# Altium PCB PCB.PcbDoc
Units mil, origin at the board's own origin, x right, y up, seen from the top; angles counter-clockwise.
Board outline 3910.03 x 3910.03 mil, 2 copper layers (Top Layer, Bottom Layer); 122 components, 81 nets, 452 pads, 78 vias.
Unrouted connection lines stored in the file: 29.
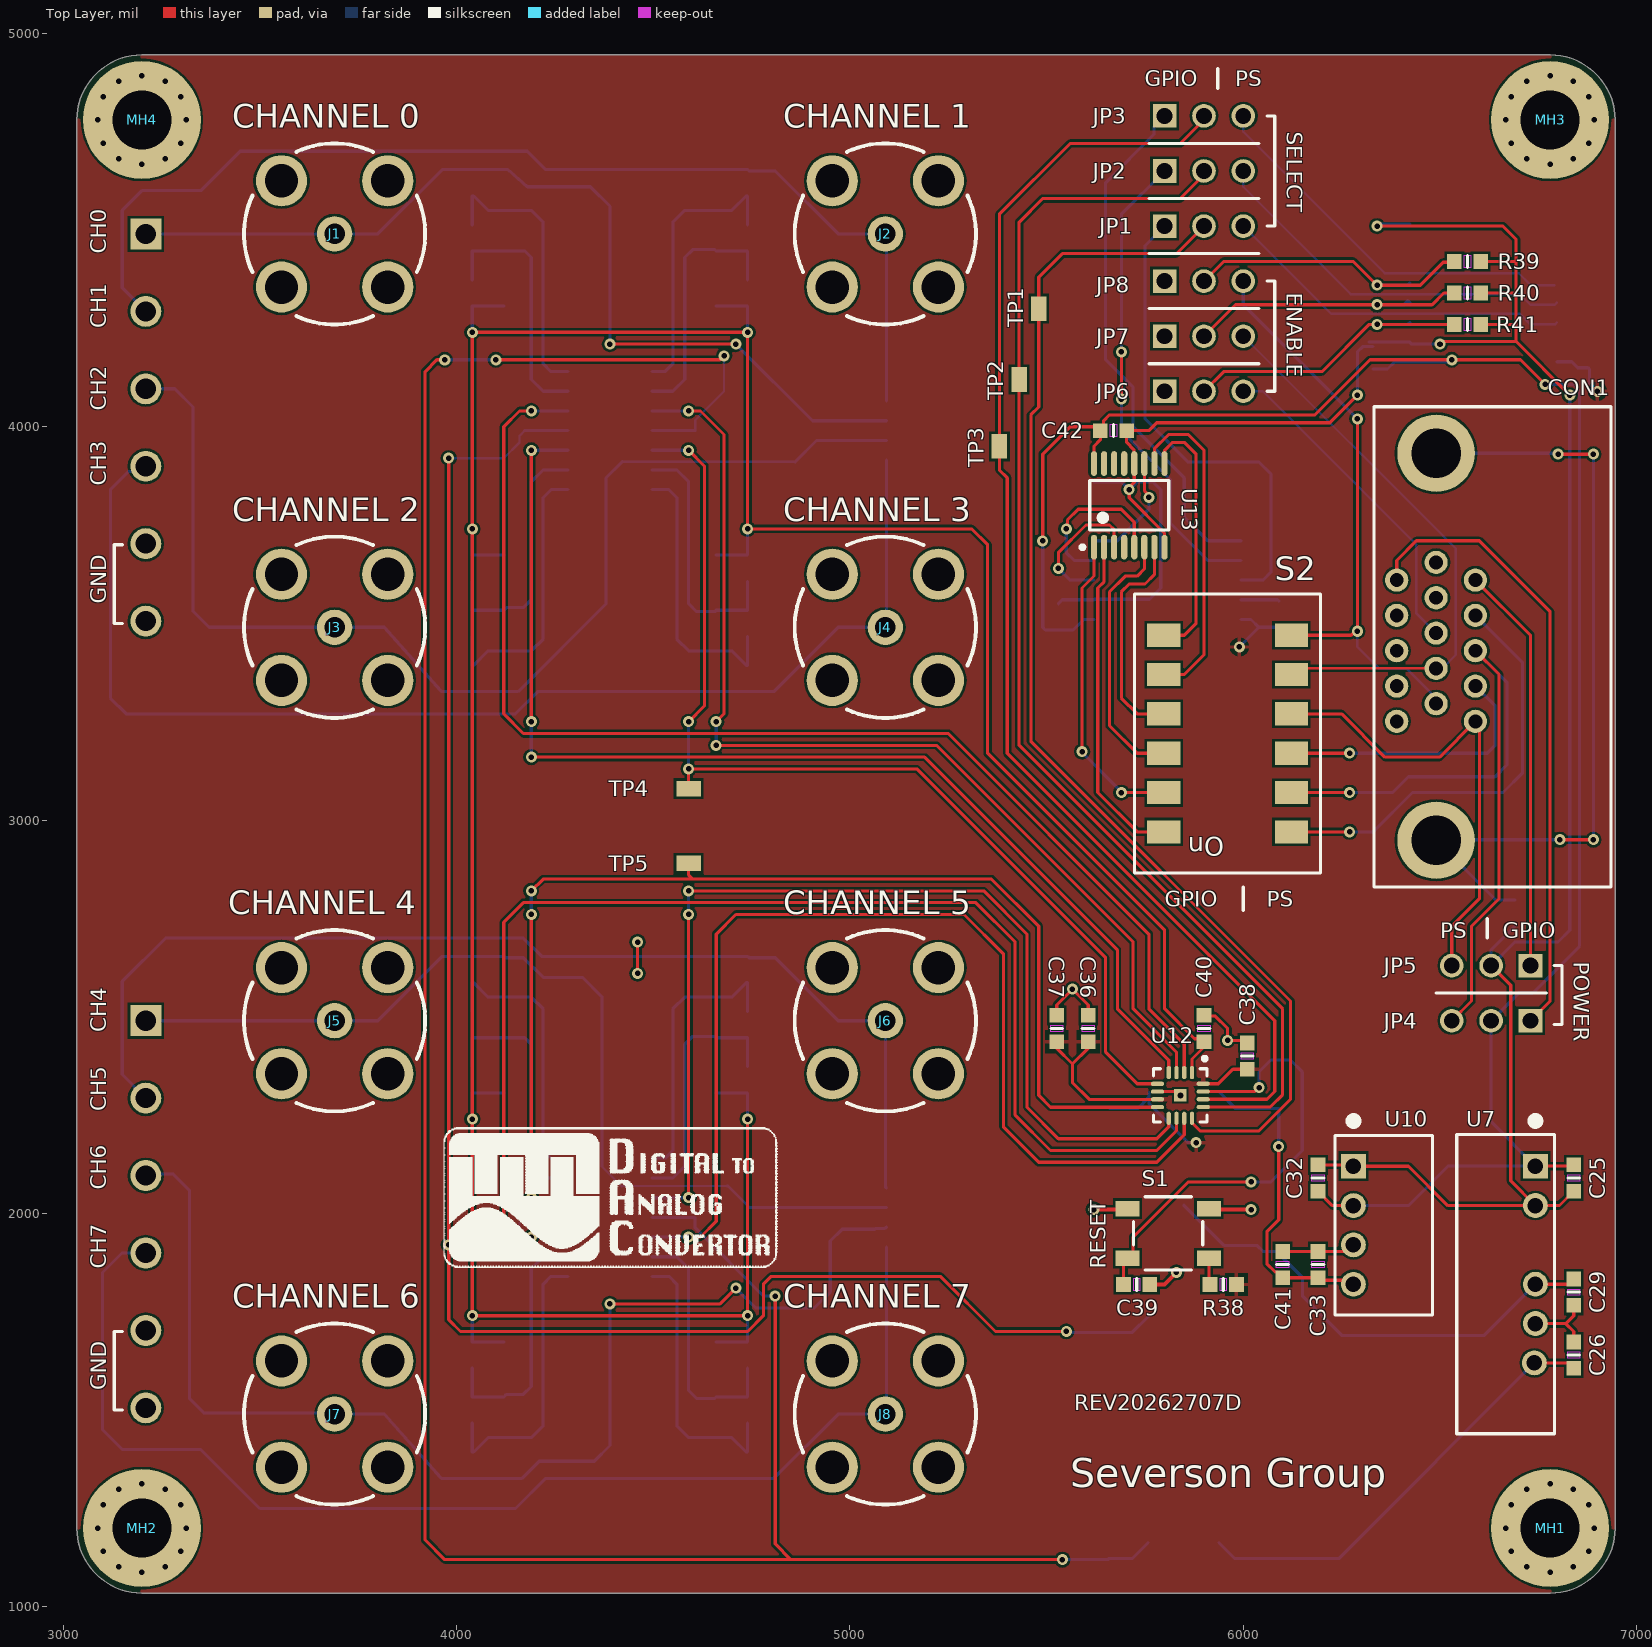
[diagram p0: Top Layer view]
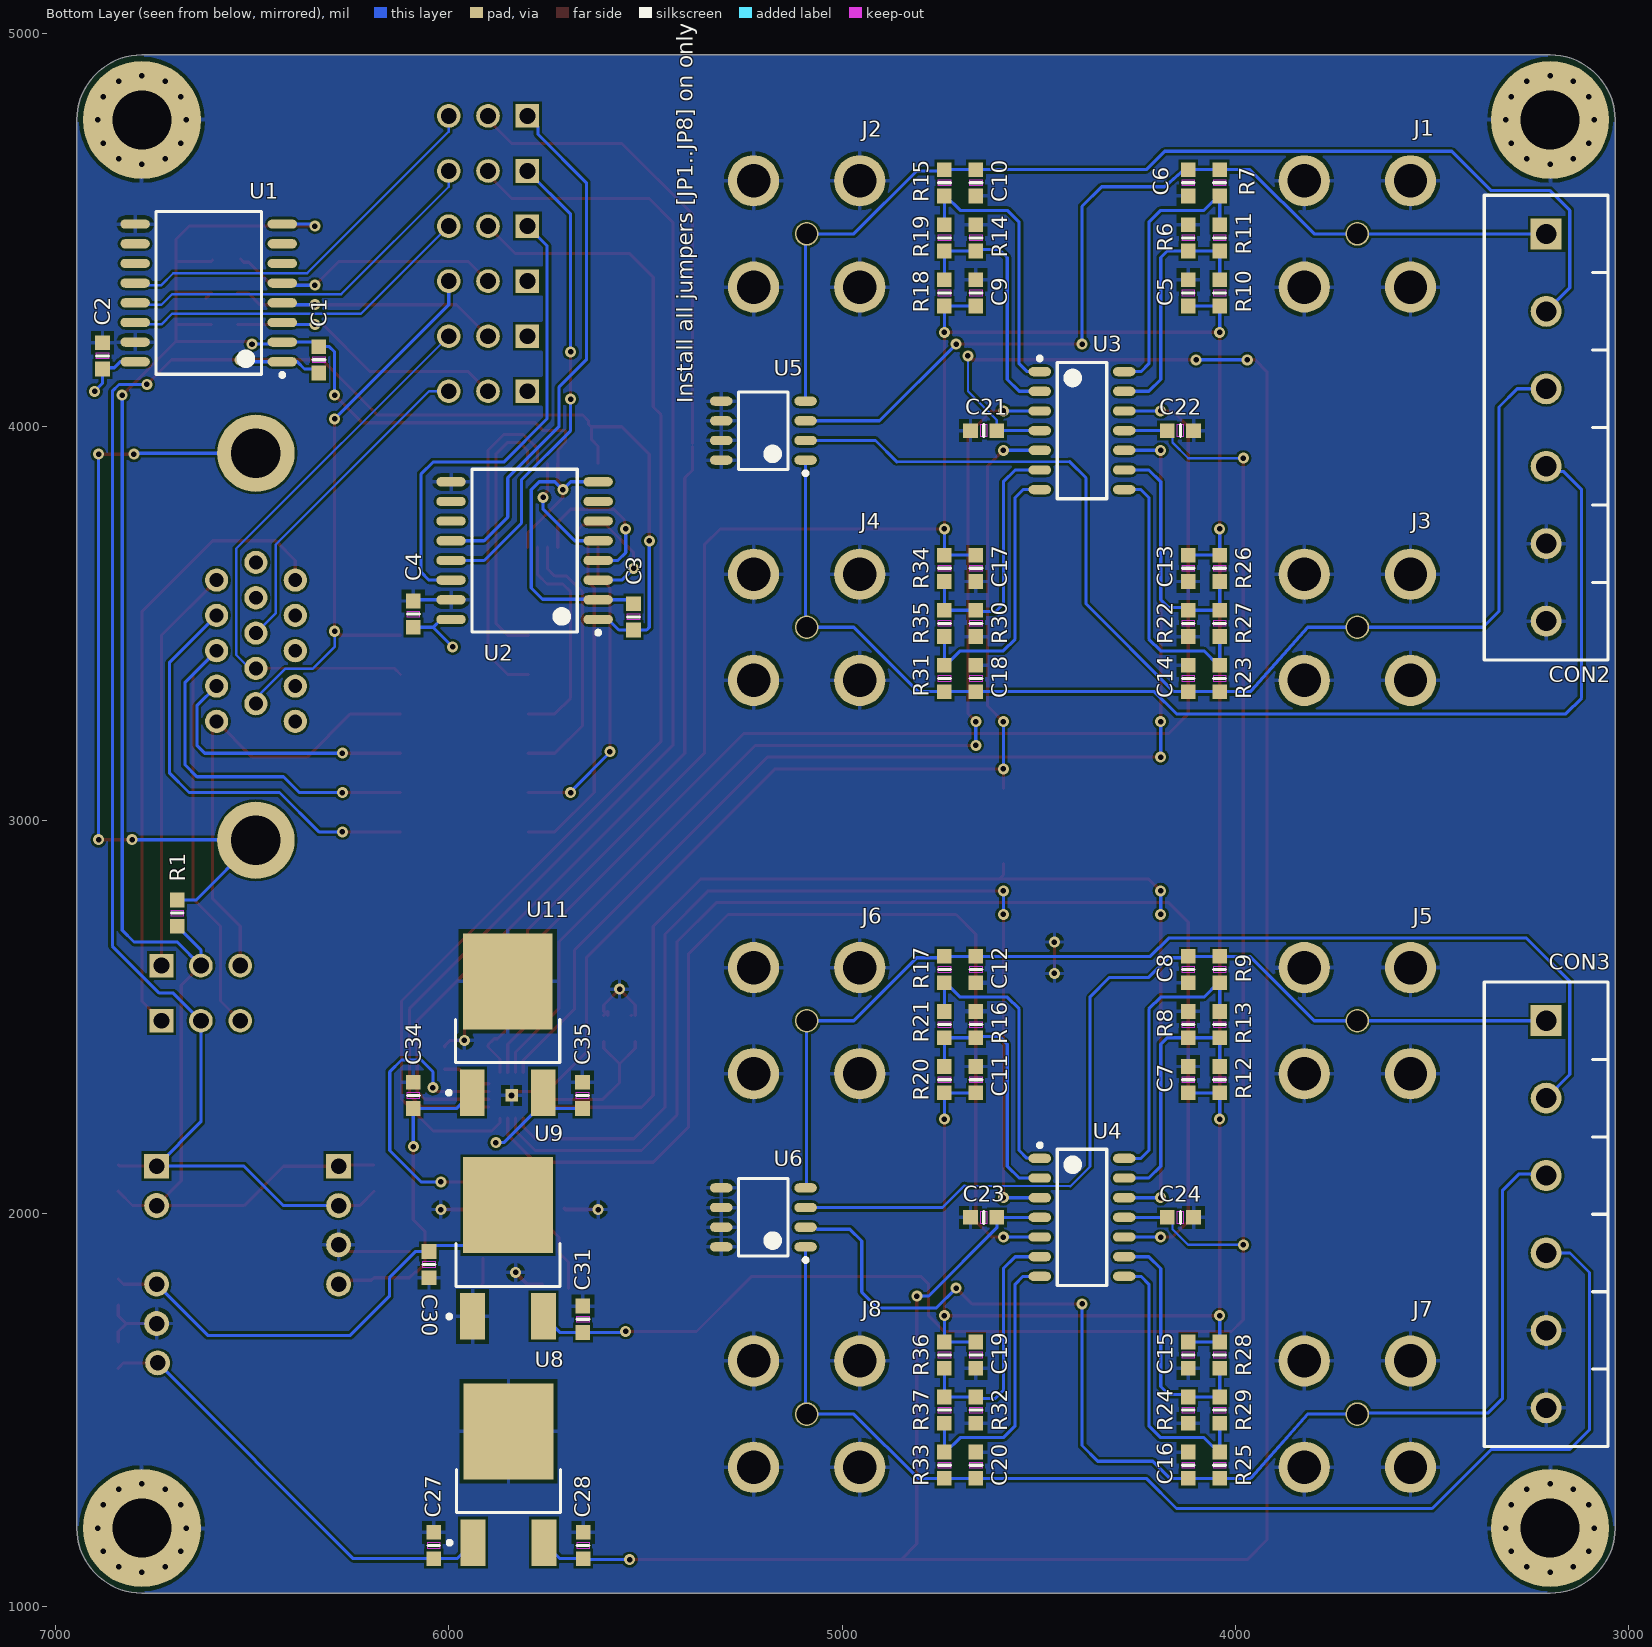
[diagram p1: Bottom Layer view, seen from below]

## Layer stack, top to bottom
Top Solder: solder mask 0.4, Solder Resist, Dk 3.5
Top Layer: signal copper 1.4
Dielectric 1: dielectric 12.6, FR-4, Dk 4.8
Bottom Layer: signal copper 1.4
Bottom Solder: solder mask 0.4, Solder Resist, Dk 3.5

## Board outline
6945.02,4780 ccw(c6780,4780) 6780,4945.02 3200,4945.02 ccw(c3200,4780) 3034.99,4780 3034.99,1200 ccw(c3200,1200) 3200,1034.98 6780,1034.98 ccw(c6780,1200) 6945.02,1200

## Design rules (kind name [scope] priority, off if disabled: settings)
Clearance [All] p1: gap=6 ignorepadtopadclearanceinfootprint=FALSE except(0: Arc-Hole Track-Hole SMDPad-Hole THPad-Hole Via-Hole Fill-Hole Poly-Hole Region-Hole Text-Hole)
DiffPairsRouting [All] p1: maxlimit=10 minlimit=10 mostfreqgap=10 substack1={6DC5AF7B-AFB7-40CB-90A0-DD7BBE91D74D} toplayer_{6dc5af7b-afb7-40cb-90a0-dd7bbe91d74d}_minwidth=15 toplayer_{6dc5af7b-afb7-40cb-90a0-dd7bbe91d74d}_maxwidth=15 toplayer_{6dc5af7b-afb7-40cb-90a0-dd7bbe91d74d}_prefwidth=15 bottomlayer_{6dc5af7b-afb7-40cb-90a0-dd7bbe91d74d}_minwidth=15 bottomlayer_{6dc5af7b-afb7-40cb-90a0-dd7bbe91d74d}_maxwidth=15 bottomlayer_{6dc5af7b-afb7-40cb-90a0-dd7bbe91d74d}_prefwidth=15 substack2={B2F53289-923C-4D80-BDE0-C70317A132FC} toplayer_{b2f53289-923c-4d80-bde0-c70317a132fc}_minwidth=15 toplayer_{b2f53289-923c-4d80-bde0-c70317a132fc}_maxwidth=15 toplayer_{b2f53289-923c-4d80-bde0-c70317a132fc}_prefwidth=15 bottomlayer_{b2f53289-923c-4d80-bde0-c70317a132fc}_minwidth=15 bottomlayer_{b2f53289-923c-4d80-bde0-c70317a132fc}_maxwidth=15 bottomlayer_{b2f53289-923c-4d80-bde0-c70317a132fc}_prefwidth=15 substack3={6217F55B-C9BC-4BE3-A519-856FA9E1F721} toplayer_{6217f55b-c9bc-4be3-a519-856fa9e1f721}_minwidth=15 toplayer_{6217f55b-c9bc-4be3-a519-856fa9e1f721}_maxwidth=15 toplayer_{6217f55b-c9bc-4be3-a519-856fa9e1f721}_prefwidth=15 bottomlayer_{6217f55b-c9bc-4be3-a519-856fa9e1f721}_minwidth=15 bottomlayer_{6217f55b-c9bc-4be3-a519-856fa9e1f721}_maxwidth=15 bottomlayer_{6217f55b-c9bc-4be3-a519-856fa9e1f721}_prefwidth=15 toplayer_minwidth=15 toplayer_maxwidth=15 toplayer_prefwidth=15 bottomlayer_minwidth=15 bottomlayer_maxwidth=15 bottomlayer_prefwidth=15 substack4={D87052B6-A27C-401B-AC05-89099C7DFB8A} toplayer_{d87052b6-a27c-401b-ac05-89099c7dfb8a}_minwidth=15 toplayer_{d87052b6-a27c-401b-ac05-89099c7dfb8a}_maxwidth=15 toplayer_{d87052b6-a27c-401b-ac05-89099c7dfb8a}_prefwidth=15 bottomlayer_{d87052b6-a27c-401b-ac05-89099c7dfb8a}_minwidth=15 bottomlayer_{d87052b6-a27c-401b-ac05-89099c7dfb8a}_maxwidth=15 bottomlayer_{d87052b6-a27c-401b-ac05-89099c7dfb8a}_prefwidth=15 substack5={7E4C404F-C848-4BC7-B60F-ECC0B7D8BEE9} toplayer_{7e4c404f-c848-4bc7-b60f-ecc0b7d8bee9}_minwidth=15 toplayer_{7e4c404f-c848-4bc7-b60f-ecc0b7d8bee9}_maxwidth=15 toplayer_{7e4c404f-c848-4bc7-b60f-ecc0b7d8bee9}_prefwidth=15 bottomlayer_{7e4c404f-c848-4bc7-b60f-ecc0b7d8bee9}_minwidth=15 bottomlayer_{7e4c404f-c848-4bc7-b60f-ecc0b7d8bee9}_maxwidth=15 bottomlayer_{7e4c404f-c848-4bc7-b60f-ecc0b7d8bee9}_prefwidth=15 substack6={9BDC3B81-D62A-426B-8E99-F9247763E9F1} toplayer_{9bdc3b81-d62a-426b-8e99-f9247763e9f1}_minwidth=15 toplayer_{9bdc3b81-d62a-426b-8e99-f9247763e9f1}_maxwidth=15 toplayer_{9bdc3b81-d62a-426b-8e99-f9247763e9f1}_prefwidth=15 bottomlayer_{9bdc3b81-d62a-426b-8e99-f9247763e9f1}_minwidth=15 bottomlayer_{9bdc3b81-d62a-426b-8e99-f9247763e9f1}_maxwidth=15 bottomlayer_{9bdc3b81-d62a-426b-8e99-f9247763e9f1}_prefwidth=15 maxuncoupledlength=500
HoleSize [All] p1: absolutevalues=TRUE maxlimit=250 minlimit=14 maxpercent=80.000 minpercent=20.000
MinimumSolderMaskSliver MinimumSolderMaskSliverException [HasFootprint('QFN50P300X300X80_HS-17N') vs HasFootprint('QFN50P300X300X80_HS-17N')] p1: minsoldermaskwidth=5.5
MinimumSolderMaskSliver [All] p2: minsoldermaskwidth=6
PolygonConnect [All] p1: connectstyle=Relief reliefconductorwidth=10 reliefentries=4 polygonreliefangle="90 Angle" airgapwidth=10
RoutingVias [All] p1: holewidth=14 width=28 viastyle="Through Hole" minholewidth=14 minwidth=28 maxholewidth=28 maxwidth=50
SilkToSilkClearance [All] p1: silktosilkclearance=6
SilkToSolderMaskClearance [IsPad] p1: minsilkscreentomaskgap=6 clearancetoexposedcopper=TRUE
SolderMaskExpansion [All] p1: expansion=4 istentingtop=FALSE
Width [All] p1: maxlimit=20 minlimit=6 preferedwidth=6 substack1={6DC5AF7B-AFB7-40CB-90A0-DD7BBE91D74D} substack2={B2F53289-923C-4D80-BDE0-C70317A132FC} substack3={6217F55B-C9BC-4BE3-A519-856FA9E1F721} substack4={D87052B6-A27C-401B-AC05-89099C7DFB8A} substack5={7E4C404F-C848-4BC7-B60F-ECC0B7D8BEE9} substack6={9BDC3B81-D62A-426B-8E99-F9247763E9F1} minimp=50.000000 maximp=50.000000 favimp=50.000000
25 further rules are at their usual default settings.

## Components (designator, comment, footprint, x,y, rotation, side; value= is the part's Value field where it differs from the comment)
C1 "CC0603KRX7R8BB104" 0603-CAP 6330,4170 r270 bottom value=0.1uF
C2 "CC0603KRX7R8BB104" 0603-CAP 6880,4180 r270 bottom value=0.1uF
C3 "CC0603KRX7R8BB104" 0603-CAP 5530,3516.54 r270 bottom value=0.1uF
C4 "CC0603KRX7R8BB104" 0603-CAP 6090,3523.46 r270 bottom value=0.1uF
C5 "CC0603KRX7R7BB184" 0603-CAP 4120,4340 r90 bottom value=0.18uF
C6 "CC0603KRX7R9BB103" 0603-CAP 4120,4620 r90 bottom value=10nF
C7 "CC0603KRX7R7BB184" 0603-CAP 4120,2340 r90 bottom value=0.18uF
C8 "CC0603KRX7R9BB103" 0603-CAP 4120,2620 r90 bottom value=10nF
C9 "CC0603KRX7R7BB184" 0603-CAP 4660,4340 r90 bottom value=0.18uF
C10 "CC0603KRX7R9BB103" 0603-CAP 4660,4620 r90 bottom value=10nF
C11 "CC0603KRX7R7BB184" 0603-CAP 4660,2340 r90 bottom value=0.18uF
C12 "CC0603KRX7R9BB103" 0603-CAP 4660,2620 r90 bottom value=10nF
C13 "CC0603KRX7R7BB184" 0603-CAP 4120,3640 r270 bottom value=0.18uF
C14 "CC0603KRX7R9BB103" 0603-CAP 4120,3360 r270 bottom value=10nF
C15 "CC0603KRX7R7BB184" 0603-CAP 4120,1640 r270 bottom value=0.18uF
C16 "CC0603KRX7R9BB103" 0603-CAP 4120,1360 r270 bottom value=10nF
C17 "CC0603KRX7R7BB184" 0603-CAP 4660,3640 r270 bottom value=0.18uF
C18 "CC0603KRX7R9BB103" 0603-CAP 4660,3360 r270 bottom value=10nF
C19 "CC0603KRX7R7BB184" 0603-CAP 4660,1640 r270 bottom value=0.18uF
C20 "CC0603KRX7R9BB103" 0603-CAP 4660,1360 r270 bottom value=10nF
C21 "CC0603KRX7R8BB104" 0603-CAP 4640,3990 r180 bottom value=0.1uF
C22 "CC0603KRX7R8BB104" 0603-CAP 4140,3990 r0 bottom value=0.1uF
C23 "CC0603KRX7R8BB104" 0603-CAP 4640,1990 r180 bottom value=0.1uF
C24 "CC0603KRX7R8BB104" 0603-CAP 4140,1990 r0 bottom value=0.1uF
C25 "CL10A475KA8NQNC" 0603-CAP 6840,2090 r90 top value=4.7uF
C26 "CL10B474KO8NNNC" 0603-CAP 6840,1640 r270 top value=0.47uF
C27 "CL10A105KP8NNNC" 0603-CAP 6038,1156 r270 bottom value=1uF
C28 "CL10A105KP8NNNC" 0603-CAP 5658,1156 r270 bottom value=1uF
C29 "CL10B474KO8NNNC" 0603-CAP 6840,1800 r270 top value=0.47uF
C30 "CL10A105KP8NNNC" 0603-CAP 6050,1870 r270 bottom value=1uF
C31 "CL10A105KP8NNNC" 0603-CAP 5659,1731 r90 bottom value=1uF
C32 "CL10A475KA8NQNC" 0603-CAP 6190,2090 r270 top value=4.7uF
C33 "CL10A105KP8NNNC" 0603-CAP 6190,1870 r270 top value=1uF
C34 "CL10A105KP8NNNC" 0603-CAP 6090,2300 r270 bottom value=1uF
C35 "CL10A105KP8NNNC" 0603-CAP 5660,2300 r270 bottom value=1uF
C36 "CL10A475KA8NQNC" 0603-CAP 5605.75,2470 r270 top value=4.7uF
C37 "CC0603KRX7R7BB184" 0603-CAP 5525.75,2470 r270 top value=0.18uF
C38 "CC0603KRX7R7BB184" 0603-CAP 6010,2400 r270 top value=0.18uF
C39 "CC0603KRX7R7BB184" 0603-CAP 5729,1819.43 r180 top value=0.18uF
C40 "CC0603KRX7R7BB184" 0603-CAP 5900,2470 r270 top value=0.18uF
C41 "CL10A105KP8NNNC" 0603-CAP 6100,1870 r270 top value=1uF
C42 "CC0603KRX7R8BB104" 0603-CAP 5670,3990 r180 top value=0.1uF
CON1 "ICD15S13E6GX00LF" ICD15S13E6GX00LF 6490,3440.51 r90 top
CON2 "1935200" 1935200 3210,4490 r270 bottom locked
CON3 "1935200" 1935200 3210,2490 r270 bottom locked
J1 "0731711900" 0731711900 3690,4490 r0 top
J2 "0731711900" 0731711900 5090,4490 r180 top
J3 "0731711900" 0731711900 3690,3490 r0 top
J4 "0731711900" 0731711900 5090,3490 r180 top
J5 "0731711900" 0731711900 3690,2490 r0 top
J6 "0731711900" 0731711900 5090,2490 r180 top
J7 "0731711900" 0731711900 3690,1490 r0 top
J8 "0731711900" 0731711900 5090,1490 r180 top
JP1 "TSW-103-07-F-S" PIN_HEADER_1X3 5900,4510 r0 top
JP2 "TSW-103-07-F-S" PIN_HEADER_1X3 5900,4650 r0 top
JP3 "TSW-103-07-F-S" PIN_HEADER_1X3 5900,4790 r0 top
JP4 "TSW-103-07-F-S" PIN_HEADER_1X3 6630,2490 r180 top
JP5 "TSW-103-07-F-S" PIN_HEADER_1X3 6630,2630 r180 top
JP6 "TSW-103-07-F-S" PIN_HEADER_1X3 5900,4090 r0 top
JP7 "TSW-103-07-F-S" PIN_HEADER_1X3 5900,4230 r0 top
JP8 "TSW-103-07-F-S" PIN_HEADER_1X3 5900,4370 r0 top
MH1 "MOUNT_HOLE" MOUNTING_HOLE 6780,1200 r180 top
MH2 "MOUNT_HOLE" MOUNTING_HOLE 3200,1200 r180 top
MH3 "MOUNT_HOLE" MOUNTING_HOLE 6780,4780 r180 top
MH4 "MOUNT_HOLE" MOUNTING_HOLE 3200,4780 r180 top
R1 "Resistor" 0603-RES 6690,2763.46 r270 bottom value=DNP
R6 "ERJ-PB3B1002V" 0603-RES 4120,4480 r270 bottom value=10K
R7 "RC0603FR-07120RL" 0603-RES 4040,4620 r90 bottom value=120
R8 "ERJ-PB3B1002V" 0603-RES 4120,2480 r270 bottom value=10K
R9 "RC0603FR-07120RL" 0603-RES 4040,2620 r90 bottom value=120
R10 "ERJ-PB3B7501V" 0603-RES 4040,4340 r90 bottom value=7.5K
R11 "ERJ-PB3B3002V" 0603-RES 4040,4480 r90 bottom value=30K
R12 "ERJ-PB3B7501V" 0603-RES 4040,2340 r90 bottom value=7.5K
R13 "ERJ-PB3B3002V" 0603-RES 4040,2480 r90 bottom value=30K
R14 "ERJ-PB3B1002V" 0603-RES 4660,4480 r270 bottom value=10K
R15 "RC0603FR-07120RL" 0603-RES 4740,4620 r90 bottom value=120
R16 "ERJ-PB3B1002V" 0603-RES 4660,2480 r270 bottom value=10K
R17 "RC0603FR-07120RL" 0603-RES 4740,2620 r90 bottom value=120
R18 "ERJ-PB3B7501V" 0603-RES 4740,4340 r90 bottom value=7.5K
R19 "ERJ-PB3B3002V" 0603-RES 4740,4480 r90 bottom value=30K
R20 "ERJ-PB3B7501V" 0603-RES 4740,2340 r90 bottom value=7.5K
R21 "ERJ-PB3B3002V" 0603-RES 4740,2480 r90 bottom value=30K
R22 "ERJ-PB3B1002V" 0603-RES 4120,3500 r90 bottom value=10K
R23 "RC0603FR-07120RL" 0603-RES 4040,3360 r270 bottom value=120
R24 "ERJ-PB3B1002V" 0603-RES 4120,1500 r90 bottom value=10K
R25 "RC0603FR-07120RL" 0603-RES 4040,1360 r270 bottom value=120
R26 "ERJ-PB3B7501V" 0603-RES 4040,3640 r270 bottom value=7.5K
R27 "ERJ-PB3B3002V" 0603-RES 4040,3500 r270 bottom value=30K
R28 "ERJ-PB3B7501V" 0603-RES 4040,1640 r270 bottom value=7.5K
R29 "ERJ-PB3B3002V" 0603-RES 4040,1500 r270 bottom value=30K
R30 "ERJ-PB3B1002V" 0603-RES 4660,3500 r90 bottom value=10K
R31 "RC0603FR-07120RL" 0603-RES 4740,3360 r270 bottom value=120
R32 "ERJ-PB3B1002V" 0603-RES 4660,1500 r90 bottom value=10K
R33 "RC0603FR-07120RL" 0603-RES 4740,1360 r270 bottom value=120
R34 "ERJ-PB3B7501V" 0603-RES 4740,3640 r270 bottom value=7.5K
R35 "ERJ-PB3B3002V" 0603-RES 4740,3500 r270 bottom value=30K
R36 "ERJ-PB3B7501V" 0603-RES 4740,1640 r270 bottom value=7.5K
R37 "ERJ-PB3B3002V" 0603-RES 4740,1500 r270 bottom value=30K
R38 "ERJ-PB3B1002V" 0603-RES 5949,1819.43 r0 top value=10K
R39 "ERJ-PB3B1002V" 0603-RES 6570,4420 r180 top value=10K
R40 "ERJ-PB3B1002V" 0603-RES 6570,4340 r180 top value=10K
R41 "ERJ-PB3B1002V" 0603-RES 6570,4260 r180 top value=10K
S1 "PTS 647 SK38 SMTR2 LFS" PTS647SK38SMTR2LFSCT-ND 5809,1949.43 r180 top
S2 "SDA06H0SBR" SDA06H0SBR 5960,3220 r180 top
TP1 "Test Point" RCU-0C 5480,4300 r0 top
TP2 "Test Point" RCU-0C 5430,4120 r180 top
TP3 "Test Point" RCU-0C 5380,3950 r180 top
TP4 "Test Point" RCU-0C 4590,3080 r90 top
TP5 "Test Point" RCU-0C 4590,2890 r90 top
U1 "ADUM130E1BRWZ" SOIC127P1030X265-16N 6610,4340 r0 bottom
U2 "ADUM130E1BRWZ" SOIC127P1030X265-16N 5807.01,3685 r0 bottom
U3 "OPA4192IDR" SOIC127P600X175-14N 4390,3990 r180 bottom
U4 "OPA4192IDR" SOIC127P600X175-14N 4390,1990 r180 bottom
U5 "SMDA12CTR" SOIC127P600X175-8N-B 5200,3990 r0 bottom
U6 "SMDA12CTR" SOIC127P600X175-8N-B 5200,1990 r0 bottom
U7 "PDME1-S5-D15-S" PDME1-S5-D15-S 6742.57,2120.18 r270 top
U8 "MC78M12BDTRKG" DPAK229P991X238-3N 5848,1304.66 r90 bottom
U9 "MC79M12CDTRKG" DPAK229P991X238-3N 5849,1879.66 r90 bottom
U10 "PDSE1-S5-S9-S" PDSE1-S5-S9-S 6280,1970 r270 top
U11 "MC78M05CDTRKG" DPAK229P991X238-3N 5850,2448.66 r90 bottom
U12 "DAC60508MCRTET" QFN50P300X300X80_HS-17N 5840,2300 r270 top
U13 "AM26C32" TSOP65P640X120-16N 5710,3800 r90 top

## Footprints (in the part's own frame and the unit in brackets; to place one, negate y for a bottom-side part, rotate by r counter-clockwise, add the part's x,y. Pads: shape width x height; smd on the part's side, far side on the other; paste and mask are expansions set on the pad)
0603-CAP [mm]
  rect 0.95x0.95 smd: 1(-0.85,0) 2(0.85,0)
  Top Layer keep-out region: -0.2,0.4 0.2,0.4 0.2,-0.4 -0.2,-0.4
  silkscreen extent 0,-0.38 0,0.38, body extent -0.77,-0.45 0.83,0.45, height 0.78
0603-RES [mm]
  rect 0.95x0.95 smd: 1(-0.85,0) 2(0.85,0)
  Top Layer keep-out region: -0.2,0.4 0.2,0.4 0.2,-0.4 -0.2,-0.4
  silkscreen extent 0,-0.38 0,0.38, body extent -0.8,-0.4 0.8,0.4, height 0.44
1935200 [mm]
  rect 2x2 hole 1.3: 1(0,0)
  round 2 hole 1.3: 2(5,0) 3(10,0) 4(15,0) 5(20,0) 6(25,0)
  silkscreen extent -2.5,-4 27.5,4, body extent -2.9,-4 27.5,5, height 11.5
0731711900 [mil] "CONN BNC JACK STR 75 OHM PCB"
  round 90 / inner round 60 / far side round 60 hole 52: 1(0,0)
  round 130 hole 85: 2(-135,-135)
  round 130 hole 85 paste-99999: 2(-135,135) 2(135,-135) 2(135,135)
  silkscreen extent -230,-230 230,230, body extent -217,-217 217,217, height 657
DPAK229P991X238-3N [mm] "D-PAK, 3-Pads, Body 6.21x6.73mm (max), IPC Medium Density"
  rect 3x1.6 smd: 1(-3.59,2.29) 3(-3.59,-2.29)
  rect 6.2x5.8 smd: 4(3.59,0)
  silkscreen extent -3.72,-3.36 1.12,3.93, body extent -4.35,-3.38 5.56,3.37, height 2.38
ICD15S13E6GX00LF [mm] "CONN DSUB HD RCPT 15POS R/A SLDR"
  round 1.5 hole 0.9: 1(4.305,2.54) 2(2.025,2.54) 3(-0.255,2.54) 4(-2.535,2.54) 5(-4.815,2.54) 6(5.445,0) 7(3.165,0) 8(0.885,0) 9(-1.395,0) 10(-3.675,0) 11(4.305,-2.54) 12(2.025,-2.54) 13(-0.255,-2.54) 14(-2.535,-2.54) 15(-4.815,-2.54)
  round 5 hole 3.2: SH1(12.495,0) SH2(-12.495,0)
  silkscreen extent -15.5,-11.3 15.5,4, body extent -15.5,-17.5 15.5,4.08, height 12.65
MOUNTING_HOLE [mil]
  round 30 hole 14: 1(-112.5,0) 1(-98.43,59.06) 1(-98.43,-59.06) 1(-59.06,98.43) 1(-59.06,-98.43) 1(0,112.5) 1(0,-112.5) 1(59.06,98.43) 1(59.06,-98.43) 1(98.43,59.06) 1(98.43,-59.06) 1(112.5,0)
  round 300 hole 150: 1(0,0)
PDME1-S5-D15-S [mm]
  rect 1.6x1.6 hole 1: 1(0,0)
  round 1.6 hole 1: 2(2.54,0) 4(7.62,0) 5(10.16,0) 6(12.704,-0.065)
  silkscreen extent -3.17,-5.08 17.28,1.24, body extent -2.23,-4.92 17.42,1.08, height 10.16
PDSE1-S5-S9-S [mm]
  rect 1.6x1.6 hole 1: 1(-3.81,0)
  round 1.6 hole 1: 2(-1.27,0) 3(1.27,0) 4(3.81,0)
  silkscreen extent -6.98,-1.19 5.8,5.1, body extent -5.8,-0.85 5.8,5.15, height 10.16
PIN_HEADER_1X3 [mil]
  rect 60x60 hole 40.16: 1(-100,0)
  round 60 hole 40.16: 2(0,0) 3(100,0)
  body extent -150,-50 150,50, height 500
PTS647SK38SMTR2LFSCT-ND [mm]
  rect 1.55x1 smd: 1(-2.625,1.6) 2(2.625,1.6) 3(-2.625,-1.6) 4(2.625,-1.6)
  silkscreen extent -2.24,-2.36 2.24,2.36, body extent -3.75,-2.25 3.75,2.25, height 4.2
QFN50P300X300X80_HS-17N [mm] "QFN, 16-Leads, Body 3.00x3.00mm, Pitch 0.50mm, Thermal Pad 0.80x0.80mm, IPC Medium Density"
  oval 0.85x0.28 smd mask+0.04: 1(-1.475,0.75) 2(-1.475,0.25) 3(-1.475,-0.25) 4(-1.475,-0.75) 9(1.475,-0.75) 10(1.475,-0.25) 11(1.475,0.25) 12(1.475,0.75)
  oval 0.28x0.85 smd mask+0.04: 5(-0.75,-1.475) 6(-0.25,-1.475) 7(0.25,-1.475) 8(0.75,-1.475) 13(0.75,1.475) 14(0.25,1.475) 15(-0.25,1.475) 16(-0.75,1.475)
  rect 0.8x0.8 smd: 17(0,0)
  rect 0.8x0.8 hole 0.4 mask+0.102: 17(0,0)
  silkscreen extent -2.5,-1.72 1.72,1.73, body extent -1.58,-1.58 1.58,1.58, height 0.8
RCU-0C [mm] "0603 PROBE PAD"
  rect 1x1.6 smd: 1(0,0)
  body extent -0.44,-0.8 0.46,0.8, height 1.12
SDA06H0SBR [mm]
  rect 2.15x1.5 smd: 1(-4.125,6.35) 2(-4.125,3.81) 3(-4.125,1.27) 4(-4.125,-1.27) 5(-4.125,-3.81) 6(-4.125,-6.35) 7(4.125,-6.35) 8(4.125,-3.81) 9(4.125,-1.27) 10(4.125,1.27) 11(4.125,3.81) 12(4.125,6.35)
  silkscreen extent -6,-9 6,9, body extent -4.65,-8.57 4.65,8.6, height 4.51
SOIC127P600X175-8N-B [mm] "SOIC, 8-Leads, Body 4.90x3.90mm, Pitch 1.27mm, IPC Medium Density"
  oval 1.45x0.6 smd: 1(-2.725,1.905) 2(-2.725,0.635) 3(-2.725,-0.635) 4(-2.725,-1.905) 5(2.725,-1.905) 6(2.725,-0.635) 7(2.725,0.635) 8(2.725,1.905)
  silkscreen extent -2.85,-2.5 1.6,2.88, body extent -3,-2.5 3,2.5, height 1.75
SOIC127P600X175-14N [mm] "SOIC, 14-Leads, Body 8.65x3.90mm, Pitch 1.27mm, IPC Medium Density"
  oval 1.45x0.6 smd: 1(-2.725,3.81) 2(-2.725,2.54) 3(-2.725,1.27) 4(-2.725,0) 5(-2.725,-1.27) 6(-2.725,-2.54) 7(-2.725,-3.81) 8(2.725,-3.81) 9(2.725,-2.54) 10(2.725,-1.27) 11(2.725,0) 12(2.725,1.27) 13(2.725,2.54) 14(2.725,3.81)
  silkscreen extent -2.85,-4.4 1.6,4.78, body extent -3,-4.4 3,4.4, height 1.75
SOIC127P1030X265-16N [mm] "SOIC, 16-Leads, Body 10.30x7.50mm, Pitch 1.27mm, IPC Medium Density"
  oval 1.9x0.6 smd: 1(-4.75,4.445) 2(-4.75,3.175) 3(-4.75,1.905) 4(-4.75,0.635) 5(-4.75,-0.635) 6(-4.75,-1.905) 7(-4.75,-3.175) 8(-4.75,-4.445) 9(4.75,-4.445) 10(4.75,-3.175) 11(4.75,-1.905) 12(4.75,-0.635) 13(4.75,0.635) 14(4.75,1.905) 15(4.75,3.175) 16(4.75,4.445)
  silkscreen extent -4.87,-5.25 3.4,5.42, body extent -5.16,-5.25 5.16,5.25, height 2.65
TSOP65P640X120-16N [mm] "TSOP, 16-Leads, Body 5.00x4.40mm, Pitch 0.65mm, IPC Medium Density"
  oval 1.6x0.4 smd mask+0.04: 1(-2.7,2.275) 2(-2.7,1.625) 3(-2.7,0.975) 4(-2.7,0.325) 5(-2.7,-0.325) 6(-2.7,-0.975) 7(-2.7,-1.625) 8(-2.7,-2.275) 9(2.7,-2.275) 10(2.7,-1.625) 11(2.7,-0.975) 12(2.7,-0.325) 13(2.7,0.325) 14(2.7,0.975) 15(2.7,1.625) 16(2.7,2.275)
  silkscreen extent -2.82,-2.55 1.6,3.15, body extent -3.2,-2.55 3.2,2.55, height 1.2

## Part data
C1 C2 C3 C4 C21 C22 C23 C24 C42: library part "Capacitor 0.1uF", "0.1µF ±10% 25V Ceramic Capacitor X7R 0603 (1608 Metric)", Supplier Part Number 1=311-1341-1-ND, Supplier 1=Digi-Key
C5 C7 C9 C11 C13 C15 C17 C19 C37 C38 C39 C40: library part "Capacitor 0.18uF", "0.18µF ±10% 16V Ceramic Capacitor X7R 0603 (1608 Metric)", Supplier Part Number 1=311-4066-1-ND, Supplier 1=Digi-Key
C6 C8 C10 C12 C14 C16 C18 C20: library part "Capacitor 10nF", "10000pF ±10% 50V Ceramic Capacitor X7R 0603 (1608 Metric)", Supplier Part Number 1=311-1085-1-ND, Supplier 1=Digi-Key
C25 C32 C36: library part "Capacitor 4.7uF", "4.7µF ±10% 25V Ceramic Capacitor X5R 0603 (1608 Metric)", Supplier Part Number 1=1276-1900-1-ND, Supplier 1=Digi-Key
C26 C29: library part "Capacitor .47uF", "0.47µF ±10% 16V Ceramic Capacitor X7R 0603 (1608 Metric)", Supplier Part Number 1=1276-1062-1-ND, Supplier 1=Digi-Key
C27 C28 C30 C31 C33 C34 C35 C41: library part "Capacitor 1uF", "1µF ±10% 10V Ceramic Capacitor X5R 0603 (1608 Metric)", Supplier Part Number 1=1276-1182-1-ND, Supplier 1=Digi-Key
CON1: "15 Position D-Sub, High Density Receptacle, Female Sockets Connector", Supplier Part Number 1=609-2801-ND, Supplier 1=Digi-Key
CON2 CON3: "6 Position Wire to Board Terminal Block Horizontal with Board 0.197\" (5.00mm) Through Hole", Supplier Part Number 1=277-1581-ND, Supplier 1=Digi-Key
J1 J2 J3 J4 J5 J6 J7 J8: "CONN BNC JACK STR 75 OHM PCB", Supplier Part Number 1=WM5517-ND, Supplier 1=Digi-Key
JP1 JP2 JP3 JP4 JP5 JP6 JP7 JP8: "Connector Header Through Hole 3 position 0.100\" (2.54mm)", Supplier Part Number 1=SAM8995-ND, Supplier 1=Digi-Key
MH1 MH2 MH3 MH4: "MOUNTING HOLE"
R1: "DNP", Supplier 1=Digi-Key
R6 R8 R14 R16 R22 R24 R30 R32 R38 R39 R40 R41: library part "Resistor 10K", "10 kOhms ±0.1% 0.2W, 1/5W Chip Resistor 0603 (1608 Metric) Automotive AEC-Q200, Pulse Withstanding Thick Film", Supplier Part Number 1=P20086CT-ND, Supplier 1=Digi-Key
R7 R9 R15 R17 R23 R25 R31 R33: library part "Resistor 120", "120 Ohms ±1% 0.1W, 1/10W Chip Resistor 0603 (1608 Metric) Moisture Resistant Thick Film", Supplier Part Number 1=311-120HRCT-ND, Supplier 1=Digi-Key
R10 R12 R18 R20 R26 R28 R34 R36: library part "Resistor 7.5K", "7.5 kOhms ±0.1% 0.2W, 1/5W Chip Resistor 0603 (1608 Metric) Automotive AEC-Q200, Pulse Withstanding Thick Film", Supplier Part Number 1=P20072CT-ND, Supplier 1=Digi-Key
R11 R13 R19 R21 R27 R29 R35 R37: library part "Resistor 30K", "30 kOhms ±0.1% 0.2W, 1/5W Chip Resistor 0603 (1608 Metric) Automotive AEC-Q200, Pulse Withstanding Thick Film", Supplier Part Number 1=P20138CT-ND, Supplier 1=Digi-Key
S1: "Tactile Switch SPST-NO Top Actuated Surface Mount", Supplier Part Number 1=PTS647SK38SMTR2LFSCT-ND, Supplier 1=Digi-Key
S2: "SWITCH SLIDE DIP SPST 25MA 24V", Supplier Part Number 1=CKN9495CT-ND, Supplier 1=Digi-Key
TP1 TP2 TP3 TP4 TP5: Color=Natural, Supplier Part Number 1=A106145CT-ND, Category="Test and Measurement", ComponentLink1Description=http://www.te.com/commerce/DocumentDelivery/DDEController?Action=srchrtrv&DocNm=1773266&DocType=DS&DocLang=English, ComponentLink1URL=http://www.te.com/commerce/DocumentDelivery/DDEController?Action=srchrtrv&DocNm=1773266&DocType=DS&DocLang=English, Material - Body=-, Material - Insulation="No Insulation", Mounting Type="Surface Mount", Packaging="Cut Tape (CT)", Part Status=Active, Plating=-, Pricing 1="1=0.22, 10=0.206, 25=0.1756, 50=0.1536, 100=0.1426, 250=0.12616, 500=0.12068, 1000=0.09874 (USD)", RoHS="RoHS Compliant", Size / Dimension="0.063\" x 0.031\" x 0.045\" (1.60mm x 0.80mm x 1.15mm)", Stock 1=136646, Supplier 1=Digi-Key, Type="PC Test Point"
U1 U2: "General Purpose Digital Isolator 3750Vrms 3 Channel 150Mbps 75kV/µs CMTI 16-SOIC (0.295\", 7.50mm Width)", Supplier Part Number 1=ADUM130E1BRWZ-ND, Supplier 1=Digi-Key
U3 U4: "General Purpose Amplifier 4 Circuit Rail-to-Rail 14-SOIC", Supplier Part Number 1=296-43159-1-ND, Supplier 1=Digi-Key
U5 U6: "19V Clamp 1A (8/20µs) Ipp TVS Diode Surface Mount 8-SO. No common node.", Supplier Part Number 1=1655-1701-1-ND, Supplier 1=Digi-Key
U7: "Isolated Module DC DC Converter 2 Output 15V -15V   34mA, 34mA 4.5V - 5.5V Input", Supplier Part Number 1=102-6323-ND, Supplier 1=Digi-Key
U8: "+12 Linear Voltage Regulator IC  1 Output  500mA DPAK", Supplier Part Number 1=MC78M12BDTRKGOSCT-ND, Supplier 1=Digi-Key
U9: "-12 Linear Voltage Regulator IC  1 Output  500mA DPAK", Supplier Part Number 1=MC79M12CDTRKGOSCT-ND, Supplier 1=Digi-Key
U10: "Isolated Module DC DC Converter 1 Output 9V    111mA 4.5V - 5.5V Input", Supplier Part Number 1=102-6292-ND, Supplier 1=Digi-Key
U11: "+5V Linear Voltage Regulator IC  1 Output  500mA DPAK", Supplier Part Number 1=MC78M05CDTRKGOSCT-ND, Supplier 1=Digi-Key
U12: "12 Bit Digital to Analog Converter 8 16-WQFN (3x3)", Supplier Part Number 1=296-52288-1-ND, Supplier 1=Digi-Key
U13: "IC RCVR RS422 QUAD DIFF 16TSSOP", Supplier Part Number 1=296-30088-1-ND, Supplier 1=Digi-Key

## Via types
v1: diameter 28, hole 14, Top Layer to Bottom Layer, tented both sides, 78 vias

## Nets (pads, with @x,y where several pads share a name; then routed paths per layer and width w, separated by ;. In a path a pad name is that pad's centre, name@x,y a point inside that pad or via, vN(x,y) a via of type N, cw(c..) or ccw(c..) an arc to the next point about the centre after c; other vN are vias at no path point)
+5V: C2.2 C4.2 C35.2 C36.2 C37.2 C38.2 R38.2 U1.16 U2.16 U11.3 U12.7 U12.16 | length 1185.9
  Top Layer w8: C37.2 5525.75,2420 5565.91,2379.84 ; C36.2 5605.75,2420 5565.91,2380.16 5565.91,2379.84 ; U12.7 5781.77,2290 5608.23,2290 5565.91,2332.32 5565.91,2379.84 ; U12.16 5936.46,2329.53 5973.46,2366.54 C38.2
  Bottom Layer w8: C35.2 5731.35,2266.54 U11.3@5759.84,2295.03 ; U11.3 U11.3@5759.84,2295.03 ; v1(5880,2180) 5859.61,2180 5759.84,2279.76 U11.3@5759.84,2295.03 ; v1(5990,3440) 6039.61,3489.61 6039.61,3490 ; U2.16 6019.61,3510 6039.61,3490 ; C4.2 6039.61,3490 ; U1.16 6835,4165 6850,4150 6876.54,4150 C2.2 6880,4110 v1(6900,4090)
+9V: C33.2 C34.2 C41.2 U10.4 U11.1 | length 815.1
  Top Layer w8: v1(6090,2170) 6090,1983.69 6060,1953.69 6060,1872.24 6081,1851.24 6085.3,1851.24 C41.2 C33.2 6196.54,1830 6270,1830 U10.4
  Bottom Layer w8: U11.1 5980.94,2266.54 C34.2 v1(6090,2170)
+12V: C21.2 C23.2 C28.2 U3.4 U4.4 U8.3 | length 7050.4
  Top Layer w8: v1(3970,4170) 3950,4170 3920,4140 3920,1170 3970,1120 4850,1120 ; v1(4100,4170) 4670,4170 v1(4680,4180) ; v1(4810,1790) 4810,1160 4850,1120 ; v1(5540,1120) 4850,1120
  Bottom Layer w6: C21.2 4606.54,4016.54 4680,4090 v1(4680,4180)
  Bottom Layer w8: v1(3970,4170) v1(4100,4170) ; U4.4 C23.2 4606.54,1963.46 4780,1790 v1(4810,1790) ; U3.4 C21.2 ; v1(5540,1120) 5655.46,1120 C28.2 5717.06,1122.54 U8.3
+15V: C26.2 C27.2 U7.6 U8.1 | length 1130.4
  Top Layer w8: U7.6 6826.54,1620 C26.2
  Bottom Layer w8: U8.1 5978.94,1122.54 C27.2 6242.54,1122.54 U7.6
-12V: C22.2 C24.2 C31.1 U3.11 U4.11 U9.3 | length 4844.8
  Top Layer w8: v1(3980,3920) v1(3980,1920) 3980,1730 4010,1700 4740,1700 4780,1740 4780,1820 4800,1840 5230,1840 5370,1700 v1(5550,1700)
  Bottom Layer w6: v1(3980,1920) 4120,1920 4160,1960 4160,1976.54 C24.2 ; v1(3980,3920) 4120,3920 4160,3960 4160,3976.54 C22.2
  Bottom Layer w8: C24.2 U4.11 ; C22.2 U3.11 ; v1(5550,1700) 5552.46,1697.54 C31.1 5718.06,1697.54 U9.3
-15V: C29.1 C30.1 U7.4 U9.4 | length 1237.5
  Top Layer w8: U7.4 6826.71,1820.18 C29.1
  Bottom Layer w8: U9.4 5951.83,1918.17 6035.3,1918.17 C30.1 6083.56,1903.46 6150.82,1836.2 6150.82,1789.18 6250,1690 6612.39,1690 U7.4 U7.4@6720.18,1820.18
AMDC_5V: C1.2 C3.2 C25.2 C32.2 C42.2 JP4.2 U1.1 U2.1 U7.1 U10.2 U13.16 | length 5238.1
  Top Layer w8: v1(5490,3710) 5490,3930 5560,4000 C42.2@5636.54,4000 ; U13.16 5620.43,3950.43 5636.54,3966.54 C42.2 C42.2@5636.54,4000 ; C42.2@5636.54,3998.05 5644.19,4005.7 5644.19,4014.19 5660,4030 6182.13,4030 6322.13,4170 v1(6530,4170) 6704.67,4170 v1(6767.34,4107.34) ; C42.2@5638.49,4000 C42.2@5636.54,4000 ; C32.2 6226.54,2020 U10.2 ; U7.1 6836.71,2120.18 C25.2
  Bottom Layer w8: v1(5490,3710) 5490,3490 5496.93,3483.07 C3.2 5567.48,3483.07 5594.41,3510 U2.1 ; U10.2 6420,2020 6520.18,2120.18 U7.1 6630,2232.75 JP4.2 6700,2560 6735.56,2560 6855,2679.44 6855,4090.36 6838.02,4107.34 v1(6767.34,4107.34) ; C1.2@6330,4146.54 6366.54,4146.54 6385,4165 U1.1 6525,4165 v1(6530,4170)
AMDC_GND: C1.1 C3.1 C25.1 C32.1 C42.1 JP5.2 R1.2 R39.1 R40.1 R41.1 U1.2 U1.8 U2.2 U2.8 U7.2 U10.1 U13.8 U13.12 | length 6501.5
  Top Layer w8: U13.8 5799.57,3729.53 5710,3819.1 v1(5710,3840) 5710,3845.95 5722.8,3858.75 U13.12 5721.87,3907.23 5721.87,3941.68 5703.46,3960.08 C42.1 5760,3990 5780,4010 6220,4010 v1(6290,4080) ; C32.1 6276.54,2123.46 U10.1 6420,2120 6520,2020 6742.39,2020 U7.2 ; v1(6340,4510) 6660,4510 6693.3,4476.7 6693.3,4420 ; v1(6500,4210) 6504.87,4210 6511.6,4216.73 6693.3,4216.73 ; R39.1@6600.32,4423.15 R39.1 6693.3,4420 ; R41.1 6693.3,4260 ; R40.1 6693.3,4340 ; R40.1@6610.25,4333.22 R40.1@6617.17,4326.3 ; JP5.2 6680,2580 6680,2082.75 U7.2 ; v1(6830,4080) 6693.3,4216.73 ; C25.1 6803.64,2020.18 U7.2 ; 6693.3,4216.73 6693.3,4260 ; 6693.3,4260 6693.3,4340 ; 6693.3,4340 6693.3,4420
  Bottom Layer w8: C3.1 5540,3560 U2.2 5621.51,3561.51 5761.51,3561.51 5790,3590 5790,3840 5770,3860 5730,3860 v1(5710,3840) 5690,3860 U2.8 ; v1(6290,4080) 6290,4190 6303.46,4203.46 C1.1 ; C1.1@6320,4215 U1.2 6427.99,4210 v1(6500,4210) ; v1(6340,4510) 6345,4515 U1.8 ; R1.2 6630,2670 JP5.2 6690,2690 6800,2690 6830,2720 v1(6830,4080)
ANLG-0: C6.2 CON2.1 J1.1 R7.2 U5.3 | length 2418.4
  Top Layer w8: v1(4390,4210) v1(4710,4210)
  Bottom Layer w8: CON2.1 J1.1 3800,4490 3963.46,4653.46 R7.2 C6.2 4126.71,4653.94 4129.19,4654.11 4180,4610 4340,4610 4390,4560 v1(4390,4210) ; v1(4710,4210) 4905,4015 U5.3
ANLG-1: C10.2 CON2.2 J2.1 R15.2 U5.4 | length 2796.9
  Bottom Layer w8: CON2.2 3150,4353.15 3150,4550 3200,4600 3350,4600 3450,4700 4180,4700 4226.54,4653.46 C10.2 R15.2 4743.46,4650 4810,4650 4970,4490 J2.1 5092.72,4487.28 U5.4
ANLG-2: C14.2 CON2.3 J3.1 R23.2 U5.2 | length 2963.4
  Bottom Layer w6: 4421.03,3911.03 4861.03,3911.03
  Bottom Layer w8: CON2.3 3283.7,4096.3 3330,4050 3330,3530.82 3370.82,3490 J3.1 3816.73,3490 3959.97,3328.42 3961.85,3326.54 R23.2 C14.2 4156.54,3326.54 4380,3550 4380,3870 4421.03,3911.03 ; 4861.03,3911.03 4915,3965 U5.2
ANLG-3: C18.2 CON2.4 J4.1 R31.2 U5.1 | length 3148.4
  Bottom Layer w8: CON2.4 3197.07,3886.52 3166.52,3886.52 3120,3840 3120,3310 3160,3270 4150,3270 4206.54,3326.54 C18.2 R31.2 4806.54,3326.54 4970,3490 J4.1 5092.72,3492.72 U5.1
ANLG-4: C8.2 CON3.1 J5.1 R9.2 U6.3 | length 2468
  Bottom Layer w6: 4370,2120 4370,2118.76 4420.01,2068.75 4687.47,2070 ; 4690,2070 4745,2015
  Bottom Layer w8: CON3.1 J5.1 3800,2490 3963.46,2653.46 R9.2 C8.2 4123.46,2650 4170,2650 4220,2600 4320,2600 4370,2550 4370,2120 ; 4687.51,2070 4690,2070 ; 4745,2015 U6.3
ANLG-5: C12.2 CON3.2 J6.1 R17.2 U6.4 | length 2820.4
  Bottom Layer w8: CON3.2 3150,2353.15 3150,2590 3260,2700 4170,2700 4216.54,2653.46 C12.2 R17.2 4743.46,2650 4810,2650 4970,2490 J6.1 5090,2067.72 U6.4
ANLG-6: C16.2 CON3.3 J7.1 R25.2 U6.2 | length 3113.3
  Top Layer w8: v1(4390,1770) 4670,1770 v1(4710,1810)
  Bottom Layer w8: CON3.3 3213.7,2100 3280,2100 3320.82,2059.18 3320.82,1530 3358.3,1492.52 3687.48,1492.52 J7.1 3816.73,1490 3959.97,1328.42 3961.85,1326.54 R25.2 C16.2 4166.54,1326.54 4210,1370 4350,1370 4390,1410 v1(4390,1770) ; v1(4710,1810) 4760,1760 4910,1760 4950,1800 4950,1930 4980,1960 5063.66,1960 5065.29,1961.63 5089.34,1961.63 U6.2
ANLG-7: C20.2 CON3.4 J8.1 R33.2 U6.1 | length 3128.9
  Bottom Layer w8: CON3.4 3149.45,1899.45 3100,1850 3100,1450 3150,1400 3350,1400 3500,1250 4150,1250 4226.54,1326.54 C20.2 R33.2 4806.54,1326.54 4970,1490 J8.1 5092.72,1492.72 U6.1
CS: JP1.2 TP1.1 U12.12 | length 3149.1
  Top Layer w8: U12.12 5869.53,2230.47 5890,2210 6040,2210 6120,2290 6120,2540 5460,3200 5460,4030 5480,4050 TP1.1 5480,4380 5540,4440 5830,4440 JP1.2
CS_ISO: JP1.1 U2.14 | length 1223
  Bottom Layer w8: JP1.1 5750,4460 5750,4020 5860,3910 6040,3910 6070,3880 6070,3630 6050,3610 U2.14
DAC-0: U3.12 U12.2 | length 3170.5
  Top Layer w8: v1(4190,4040) 4160,4040 4120,4000 4120,3270 4170,3220 5250,3220 5760,2710 5760,2520 5850,2430 5850,2358.23 U12.2
  Bottom Layer w8: v1(4190,4040) U3.12
DAC-1: U3.3 U12.3 | length 2650.5
  Top Layer w8: v1(4590,4040) 4620,4040 4680,3980 4680,3270 v1(4660,3250) ; v1(4660,3190) 5220,3190 5720,2690 5720,2520 5830.16,2409.84 U12.3
  Bottom Layer w8: U3.3 v1(4590,4040) ; v1(4660,3190) v1(4660,3250)
DAC-2: U3.10 U12.4 | length 2931.7
  Top Layer w8: v1(4190,3160) 5190,3160 5680,2670 5680,2520 5810.47,2389.53 U12.4 ; v1(4190,3250) v1(4190,3940)
  Bottom Layer w8: v1(4190,3160) v1(4190,3250) ; v1(4190,3940) U3.10
DAC-3: TP4.1 U3.5 U12.5 | length 2649.9
  Top Layer w8: TP4.1 v1(4590,3130) 5170,3130 5650,2650 5650,2410 5730.47,2329.53 U12.5 ; v1(4590,3250) 4630,3290 4630,3900 v1(4590,3940)
  Bottom Layer w8: U3.5 v1(4590,3940) ; v1(4590,3130) v1(4590,3250)
DAC-4: TP5.1 U4.12 U12.8 | length 3013.3
  Top Layer w8: v1(4190,2040) v1(4190,2760) ; v1(4190,2820) 4220,2850 4600,2850 ; TP5.1 4590,2860 4600,2850 ; U12.8@5781.93,2270 5510,2270 5480,2300 5480,2730 5360,2850 4600,2850
  Bottom Layer w8: v1(4190,2040) U4.12 ; v1(4190,2760) v1(4190,2820)
DAC-5: U4.3 U12.9 | length 2646
  Top Layer w8: v1(4590,2040) v1(4590,2760) ; v1(4590,2820) 5340,2820 5450,2710 5450,2270 5530,2190 5780,2190 5810.47,2220.47 U12.9
  Bottom Layer w8: U4.3 v1(4590,2040) ; v1(4590,2760) v1(4590,2820)
DAC-6: U4.10 U12.10 | length 3241.4
  Top Layer w8: v1(4190,1940) 4160,1940 4120,1980 4120,2740 4170,2790 5320,2790 5420,2690 5420,2250 5510,2160 5780,2160 5830.16,2210.16 U12.10
  Bottom Layer w8: v1(4190,1940) U4.10
DAC-7: U4.5 U12.11 | length 2709.6
  Top Layer w8: v1(4590,1940) 4620,1940 4660,1980 4660,2710 4710,2760 5290,2760 5390,2660 5390,2220 5480,2130 5780,2130 5849.84,2199.84 U12.11
  Bottom Layer w8: U4.5 v1(4590,1940)
GND: C2.1 C4.1 C5.2 C6.1 C7.2 C8.1 C9.2 C10.1 C11.2 C12.1 C13.2 C14.1 C15.2 C16.1 C17.2 C18.1 C19.2 C20.1 C21.1 C22.1 C23.1 C24.1 C26.1 C27.1 C28.1 C29.2 C30.2 C31.2 C33.1 C34.1 C35.1 C36.1 C37.1 C38.1 C39.1 C40.1 C41.1 CON2.5 CON2.6 CON3.5 CON3.6 J1.2 J2.2 J3.2 J4.2 J5.2 J6.2 J7.2 J8.2 MH1.1 MH2.1 MH3.1 MH4.1 R6.1 R8.1 R14.1 R16.1 R22.1 R24.1 R30.1 R32.1 S1.3 S1.4 U1.9 U1.15 U2.9 U2.15 U5.5 U5.6 U5.7 U5.8 U6.5 U6.6 U6.7 U6.8 U7.5 U8.4 U9.1 U10.3 U11.4 U12.6 U12.17 | length 1231.8
  Top Layer w8: v1(4460,2610) v1(4460,2690) ; C37.1 5525.75,2530 v1(5565.75,2570) 5605.75,2530 C36.1@5605.75,2513.6 ; C37.1@5535.75,2503.46 C37.1@5535.88,2503.6 ; C36.1@5595.61,2513.6 C36.1 ; C36.1@5595.75,2503.46 C36.1@5595.75,2513.6 ; U12.6 5830.16,2309.84 U12.17@5840,2300 ; C40.1 5901.31,2502.16 5927.84,2502.16 5960,2470 v1(5960,2440) 5996.3,2440 6010,2426.3 C38.1@6010,2423.66 ; C41.1 C33.1 6263.46,1903.46 U10.3 ; U7.5 6819.82,1720.18 6820,1720 ; C26.1 6840,1700 6820,1720 ; C29.2 6840,1740 6820,1720
  Top Layer w10: v1(5620,2010) 5703.24,2010 S1.4 ; C39.1 5799.43,1819.43 v1(5830,1850) ; S1.3 5914.76,2010 v1(6020,2010)
  Bottom Layer w8: U2.15 6086.93,3560 C4.1
GPIO_5V: CON1.1 JP4.1 | length 1596
  Top Layer w8: CON1.1 6390,3660 6440,3710 6600,3710 6780,3530 6780,2540 JP4.1
GPIO_24V: CON1.6
GPIO_GND: CON1.11 JP5.1 | length 1038
  Top Layer w8: CON1.11 6730,3470 JP5.1
GPIOX_IN1_N: CON1.3
GPIOX_IN1_P: CON1.2
GPIOX_IN2_N: CON1.5
GPIOX_IN2_P: CON1.4
GPIOX_IN3_N: CON1.8 JP6.3 | length 861
  Bottom Layer w6: JP6.3 6050,4090 6440,3700 6440,3525.35 CON1.8
  Bottom Layer w8: JP6.3 JP6.3@6010,4080
GPIOX_IN3_P: CON1.7
GPIOX_OUT1_N: CON1.13 JP4.3 S2.2 | length 1915.2
  Top Layer w8: S2.2 v1(6270,3070) ; JP4.3 6580,2540 6580,2730 6650,2800 6650,3370.47 CON1.13
  Bottom Layer w8: v1(6270,3070) 6380,3070 6420,3110 6640,3110 6670,3140 6670,3350.47 CON1.13
GPIOX_OUT1_P: CON1.12 S2.1 | length 1099.7
  Top Layer w8: S2.1 v1(6270,2970)
  Bottom Layer w8: v1(6270,2970) 6330,2970 6430,3070 6660,3070 6710,3120 6710,3400.24 CON1.12
GPIOX_OUT2_N: CON1.15 JP5.3 S2.4 | length 1204.9
  Top Layer w8: S2.4 6250,3270 6360,3160 6499.06,3160 CON1.15 6600,3240.94 6600,2800 6530,2730 JP5.3
GPIOX_OUT2_P: CON1.14 S2.3 | length 697.3
  Top Layer w8: S2.3 v1(6270,3170)
  Bottom Layer w8: v1(6270,3170) 6620,3170 6640,3190 6640,3290.71 CON1.14
GPIOX_OUT3_N: CON1.10 JP8.3 S2.6 | length 1489.9
  Top Layer w8: S2.6 6274.05,3470 6284.05,3480 v1(6290,3480) v1(6290,4020)
  Bottom Layer w6: v1(6290,3480) 6290,3440 6345,3385 6415,3385 6490,3310 CON1.10
  Bottom Layer w8: JP8.3 6000,4310 v1(6290,4020)
GPIOX_OUT3_P: CON1.9 JP7.3 S2.5 | length 1472
  Top Layer w6: S2.5@6137.99,3385.59 CON1.9
  Top Layer w8: S2.5 S2.5@6137.99,3385.59
  Bottom Layer w6: JP7.3 6540,3690 6540,3420 CON1.9@6505.59,3385.59
  Bottom Layer w8: CON1.9 CON1.9@6505.59,3385.59
INV_STS_A_ISO: JP1.3 U1.14 | length 902.6
  Bottom Layer w6: JP1.3 6223,4287 6703,4287 6730,4260 6792.01,4260 U1.14
INV_STS_B_ISO: JP2.3 U1.13 | length 963.3
  Bottom Layer w6: JP2.3 6000,4610 6273.39,4336.61 6703.39,4336.61 6730,4310 6792.01,4310 U1.13
INV_STS_C_ISO: JP3.3 U1.12 | length 991.5
  Bottom Layer w6: JP3.3 6000,4750 6360,4390 6700,4390 6730,4360 U1.12@6790,4360
NetC39_2: C39.2 S1.2 U12.15 | length 1182.8
  Top Layer w8: C39.2@5695.54,1809.43 C39.2 5695.54,1876.32 S1.2 5720,1900.78 5720,1940 5860,2080 v1(6020,2080) ; U12.15 6029.84,2309.84 v1(6040,2320)
  Bottom Layer w8: v1(6020,2080) 6070,2080 6150,2160 6150,2360 6120,2390 6070,2390 6040,2360 v1(6040,2320)
NetJP6_2: JP6.2 R41.2 U1.3 | length 792
  Top Layer w8: JP6.2 5950,4140 6200,4140 6320,4260 R41.2
  Bottom Layer w8: v1(6340,4260) 6417.99,4260 U1.3
NetJP7_2: JP7.2 R40.2 U1.4 | length 771.3
  Top Layer w8: JP7.2 5980,4310 v1(6340,4310) 6480,4310 6510,4340 R40.2
  Bottom Layer w8: v1(6340,4310) 6407.99,4310 6417.99,4320 U1.4
NetJP8_2: JP8.2 R39.2 U1.5 | length 787.5
  Top Layer w8: JP8.2 5950,4420 6279.61,4420 v1(6340,4359.61) 6449.61,4359.61 6508.11,4418.11 6520.83,4418.11 R39.2@6528.98,4426.25
  Bottom Layer w8: v1(6340,4359.61) 6417.6,4359.61 6417.99,4360 U1.5
NetR6_2: R6.2 R10.2 R11.1 U3.13 | length 645.1
  Bottom Layer w8: R10.2 R11.1 R6.2 4173.46,4446.54 4190,4430 4190,4120 4220,4090 U3.13
NetR7_1: R7.1 R11.2 U3.14 | length 711.6
  Bottom Layer w8: R11.2 R7.1 4043.46,4586.54 4080,4550 4190,4550 4220,4520 4220,4160 4240,4140 U3.14
NetR8_2: R8.2 R12.2 R13.1 U4.13 | length 645.1
  Bottom Layer w8: R12.2 R13.1 R8.2 4173.46,2446.54 4190,2430 4190,2120 4220,2090 U4.13
NetR9_1: R9.1 R13.2 U4.14 | length 711.6
  Bottom Layer w8: R13.2 R9.1 4043.46,2586.54 4080,2550 4190,2550 4220,2520 4220,2160 4240,2140 U4.14
NetR14_2: R14.2 R18.2 R19.1 U3.2 | length 647.9
  Bottom Layer w8: U3.2 4550,4090 4580,4120 4580,4430 4600,4450 4656.54,4450 R14.2 R19.1 R18.2
NetR15_1: R15.1 R19.2 U3.1 | length 711.6
  Bottom Layer w8: U3.1 4498.01,4140.72 4530.72,4140.72 4550,4160 4550,4520 4580,4550 4700,4550 4736.54,4586.54 R15.1 R19.2
NetR16_2: R16.2 R20.2 R21.1 U4.2 | length 647.9
  Bottom Layer w8: U4.2 4550,2090 4580,2120 4580,2430 4600,2450 4656.54,2450 R16.2 R21.1 R20.2
NetR17_1: R17.1 R21.2 U4.1 | length 711.6
  Bottom Layer w8: U4.1 4498.01,2140.72 4530.72,2140.72 4550,2160 4550,2520 4580,2550 4700,2550 4736.54,2586.54 R17.1 R21.2
NetR22_2: R22.2 R26.2 R27.1 U3.9 | length 639.2
  Bottom Layer w8: R26.2 R27.1 R22.2 4126.54,3540 4170,3540 4190,3560 4190,3860 4220,3890 U3.9
NetR23_1: R23.1 R27.2 U3.8 | length 711.6
  Bottom Layer w8: R27.2 R23.1 4043.46,3393.46 4080,3430 4190,3430 4220,3460 4220,3820 4240,3840 U3.8
NetR24_2: R24.2 R28.2 R29.1 U4.9 | length 639.2
  Bottom Layer w8: R28.2 R29.1 R24.2 4126.54,1540 4170,1540 4190,1560 4190,1860 4220,1890 U4.9
NetR25_1: R25.1 R29.2 U4.8 | length 711.6
  Bottom Layer w8: R29.2 R25.1 4043.46,1393.46 4080,1430 4190,1430 4220,1460 4220,1820 4240,1840 U4.8
NetR30_2: R30.2 R34.2 R35.1 U3.6 | length 647.9
  Bottom Layer w8: U3.6 4560,3890 4590,3860 4590,3550 4610,3530 4656.54,3530 R30.2 R35.1 R34.2
NetR31_1: R31.1 R35.2 U3.7 | length 711.6
  Bottom Layer w8: U3.7 4540,3840 4560,3820 4560,3460 4590,3430 4700,3430 4736.54,3393.46 R31.1 R35.2
NetR32_2: R32.2 R36.2 R37.1 U4.6 | length 647.9
  Bottom Layer w8: U4.6 4560,1890 4590,1860 4590,1550 4610,1530 4656.54,1530 R32.2 R37.1 R36.2
NetR33_1: R33.1 R37.2 U4.7 | length 711.6
  Bottom Layer w8: U4.7 4540,1840 4560,1820 4560,1460 4590,1430 4700,1430 4736.54,1393.46 R33.1 R37.2
NetR38_1: R38.1 S1.1 | length 68.3
  Top Layer w8: S1.1 5912.35,1822.61 R38.1
NetS2_7: S2.7 U13.9 | length 659.4
  Top Layer w8: S2.7 5850,3470 5880,3500 5880,3930 5850,3960 5820,3960 5800,3940 5800,3906.73 U13.9
NetS2_8: S2.8 U13.10 | length 838.3
  Top Layer w8: U13.10 5773.98,3943.98 5810,3980 5860,3980 5900,3940 5900,3420 5850,3370 S2.8
NetS2_9: S2.9 U13.7 | length 566.1
  Top Layer w8: U13.7 5773.98,3623.98 5750,3600 5710,3600 5690,3580 5690,3310 5730,3270 S2.9
NetS2_10: S2.10 U13.6 | length 674.5
  Top Layer w8: U13.6 5748.39,3638.39 5730,3620 5700,3620 5660,3580 5660,3240 5730,3170 S2.10
NetS2_11: S2.11 U13.1 | length 785.3
  Top Layer w8: v1(5590,3174.24) 5590,3590 5620.43,3620.43 U13.1 ; v1(5690,3070) S2.11
  Bottom Layer w8: v1(5590,3174.24) 5590,3172.12 5690,3072.12 v1(5690,3070)
NetS2_12: S2.12 U13.2 | length 839.4
  Top Layer w8: U13.2 5646.02,3606.02 5630,3590 5630,3070 5730,2970 S2.12
NetU2_3: U2.3 U13.3 | length 362.5
  Top Layer w8: v1(5530,3640) 5530,3680 5600,3750 5660,3750 5671.61,3738.39 U13.3
  Bottom Layer w8: v1(5530,3640) 5560,3610 U2.3
NetU2_4: U2.4 U13.5 | length 420.6
  Top Layer w8: v1(5550,3740) 5553,3743 5553,3763 5580,3790 5690,3790 5722.8,3757.2 U13.5
  Bottom Layer w8: v1(5550,3740) 5550,3680 5570,3660 U2.4
NetU2_5: U2.5 U13.11 | length 294.2
  Top Layer w8: U13.11 5748.39,3837.57 5760,3825.95 v1(5760,3820)
  Bottom Layer w8: U2.5 5680,3710 5760,3790 v1(5760,3820)
SCLK: JP2.2 TP2.1 U12.13 | length 3240.1
  Top Layer w8: U12.13 6068.35,2270.47 6100,2302.13 6100,2520 5430,3190 5430,4110 5430,4520 5490,4580 5840,4580 5900,4640 JP2.2
SCLK_ISO: JP2.1 U2.13 | length 1210.7
  Top Layer w8: v1(5690,4070) v1(5690,4190)
  Bottom Layer w8: v1(5690,4070) 5690,3990 5815,3865 5815,3755 5910,3660 U2.13 ; v1(5690,4190) 5690,4540 JP2.1
SDI: JP3.2 TP3.1 U12.14 | length 3331.8
  Top Layer w8: TP3.1 5380,3890 5400,3870 5400,3170 6080,2490 6080,2310 6060.16,2290.16 U12.14 ; TP3.1@5380,3957.68 5380,4540 5560,4720 5840,4720 5900,4780 JP3.2
SDI_ISO: JP3.1 U2.12 | length 1333.8
  Bottom Layer w8: JP3.1 5773,4763 5773,4743 5650,4620 5650,4170 5720,4100 5720,4000 5850,3870 5850,3770 5910,3710 U2.12
SH_CON: CON1.SH1 CON1.SH2 R1.1 | length 2044.4
  Top Layer w8: v1(6800,3930) v1(6890,3930) ; v1(6805,2950) v1(6890,2950)
  Bottom Layer w8: CON1.SH1 6797.56,3932.44 v1(6800,3930) ; R1.1 6641.65,2796.93 CON1.SH2 6491.42,2950 v1(6805,2950) ; v1(6890,2950) v1(6890,3930)
VREF: C5.1 C7.1 C9.1 C11.1 C13.1 C15.1 C17.1 C19.1 C40.2 R10.1 R12.1 R18.1 R20.1 R26.1 R28.1 R34.1 R36.1 U12.1 | length 8286.2
  Top Layer w8: v1(4740,2240) v1(4740,1740) v1(4040,1740) v1(4040,2240) v1(4040,3740) v1(4040,4240) v1(4740,4240) v1(4740,3740) 5310,3740 5350,3700 5350,3170 5800,2720 5800,2520 5875.81,2444.19 5884.3,2444.19 5900,2428.49 5900,2423.07 5869.53,2392.6 U12.1
  Bottom Layer w8: v1(4040,1740) R28.1 C15.1 ; v1(4040,2240) R12.1 C7.1 ; v1(4040,3740) R26.1 C13.1 ; v1(4040,4240) R10.1 C5.1 ; C19.1 R36.1 v1(4740,1740) ; C11.1 R20.1 v1(4740,2240) ; C17.1 R34.1 v1(4740,3740) ; C9.1 R18.1 v1(4740,4240)
pads on no net: JP6.1 JP7.1 JP8.1 U1.6 U1.7 U1.10 U1.11 U2.6 U2.7 U2.10 U2.11 U13.4 U13.13 U13.14 U13.15

## Polygon pours and split planes (outlines as drawn)
GND on Bottom Layer "GND_L02_P001" (solid, remove dead copper, pour order 1): 3034.99,4945.02 3034.99,1035.08 6945.01,1035.08 6945.01,4945.01
+5V on Top Layer "+5V_L01_P004" (solid, pour order 4): 6945,4780 6780,4945 3200,4945 3035,4780 3035,1200 3200,1035 6780,1035 6945,1200

## Silkscreen, mask and mechanical layers (free items; w line width, h text height)
Top Overlay:
  drawing of 52 lines, arcs and shapes, not listed
  text "GPIO" at 5750,4865 h40
  text "PS" at 5980,4865 h40
  text "CHANNEL 0" at 3430,4760 h60
  text "CHANNEL 1" at 4830,4760 h60
  text "SELECT" at 6110,4750 h40 r270
  text "CH0" at 3110,4440 h40 r90
  text "ENABLE" at 6110,4340 h40 r270
  text "CH1" at 3110,4250 h40 r90
  text "CH2" at 3110,4040 h40 r90
  text "CH3" at 3110,3850 h40 r90
  text "CHANNEL 2" at 3430,3760 h60
  text "CHANNEL 3" at 4830,3760 h60
  text "GND" at 3110,3550 h40 r90
  text "GPIO" at 5800,2780 h40
  text "PS" at 6060,2780 h40
  text "CHANNEL 4" at 3420,2760 h60
  text "CHANNEL 5" at 4830,2760 h60
  text "PS" at 6500,2700 h40
  text "GPIO" at 6660,2700 h40
  text "POWER" at 6840,2640 h40 r270
  text "CH4" at 3110,2460 h40 r90
  text "CH5" at 3110,2260 h40 r90
  text "CH6" at 3110,2060 h40 r90
  text "CH7" at 3110,1860 h40 r90
  text "RESET" at 5650,1860 h40 r90
  text "CHANNEL 6" at 3430,1760 h60
  text "CHANNEL 7" at 4830,1760 h60
  text "GND" at 3110,1550 h40 r90
  text "REV20262707D" at 5570,1500 h40
  text "Severson Group" at 5560,1280 h125
Bottom Overlay:
  text "Install all jumpers [JP1..JP8] on only one side of the pin headers!" at 5380,4060 h40 r270
Mechanical 1:
  the board outline again, w5

## Text inside footprints (layer, text, board x,y; h text height)
S2: Top Overlay "On" at 5952.13,2956.22 h47.24 r180